# EAGLE board Qwiic_AS3935_Lightning_Detector-Panel (EAGLE 9.2.1), part 1 of 3
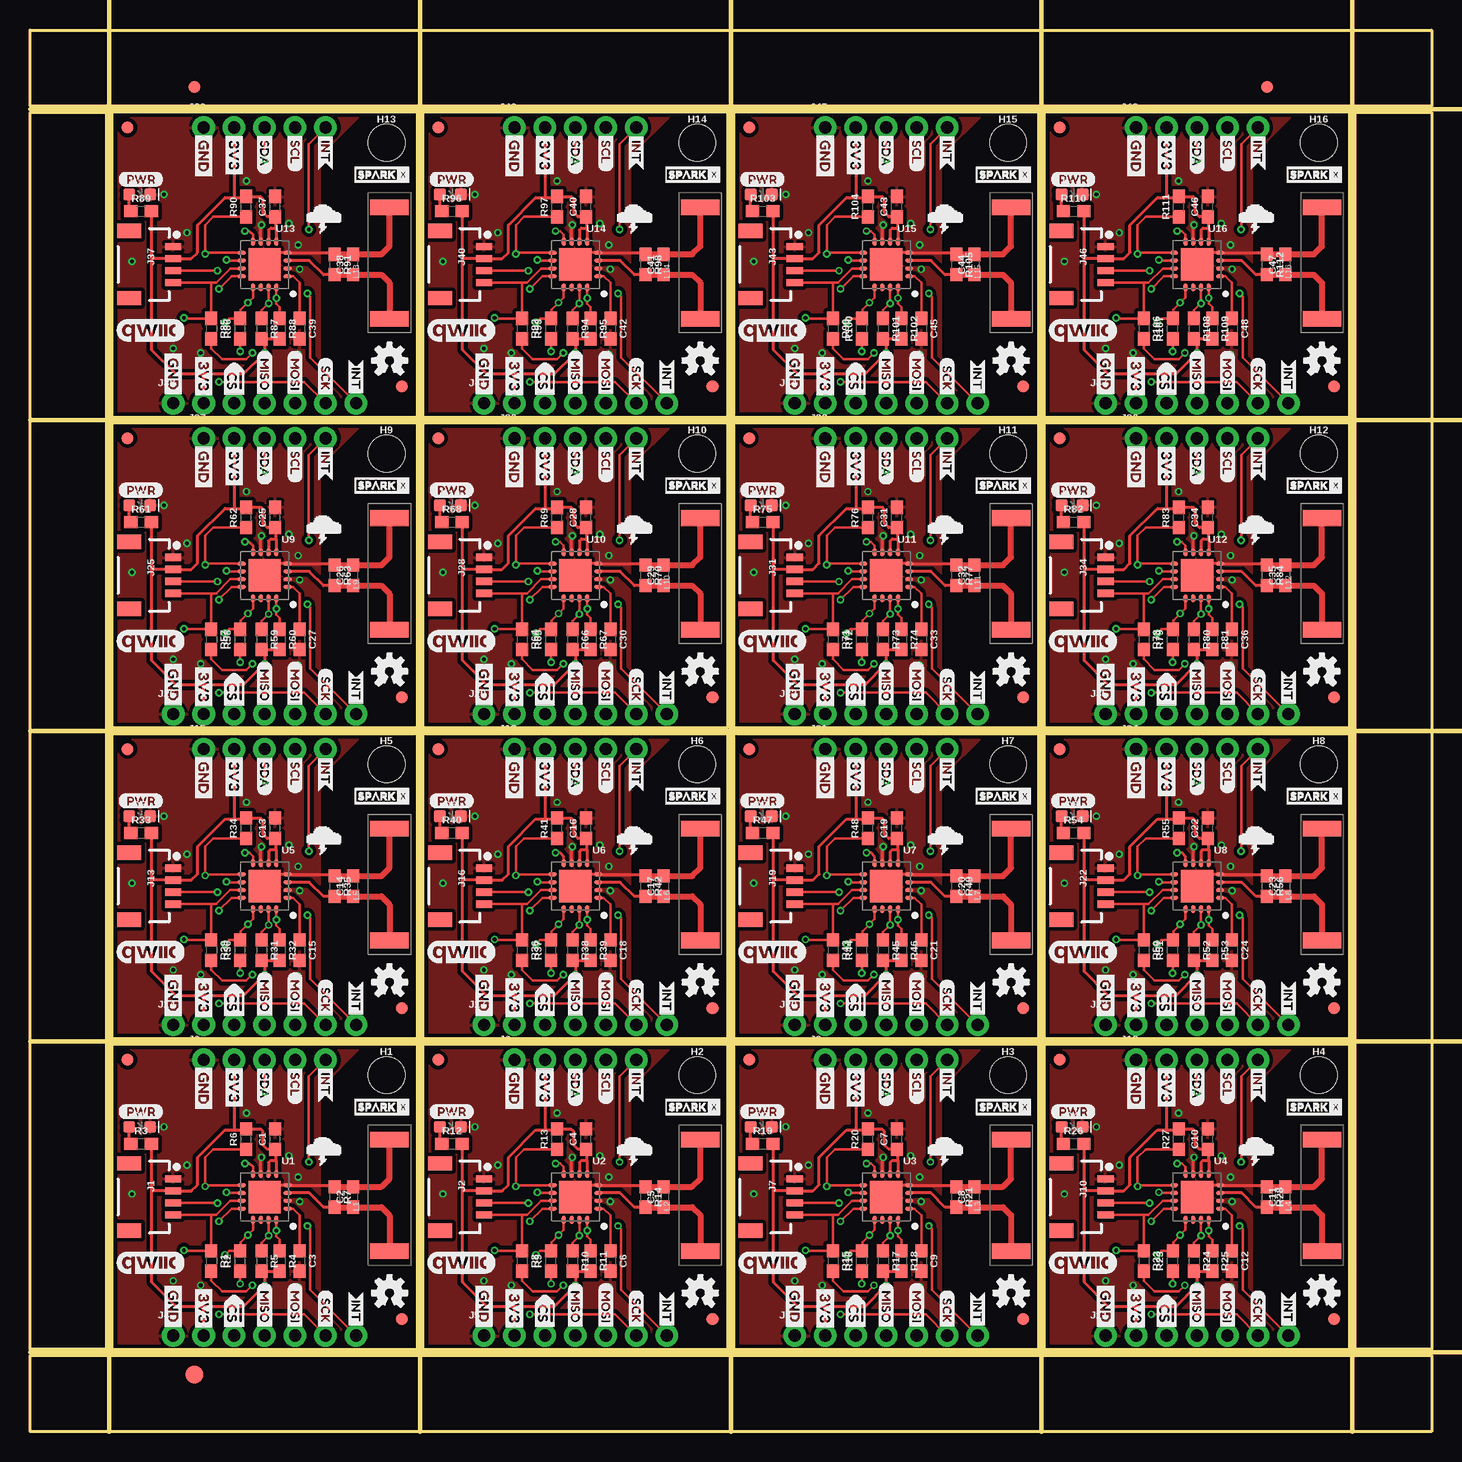
[diagram p0: board, top side]
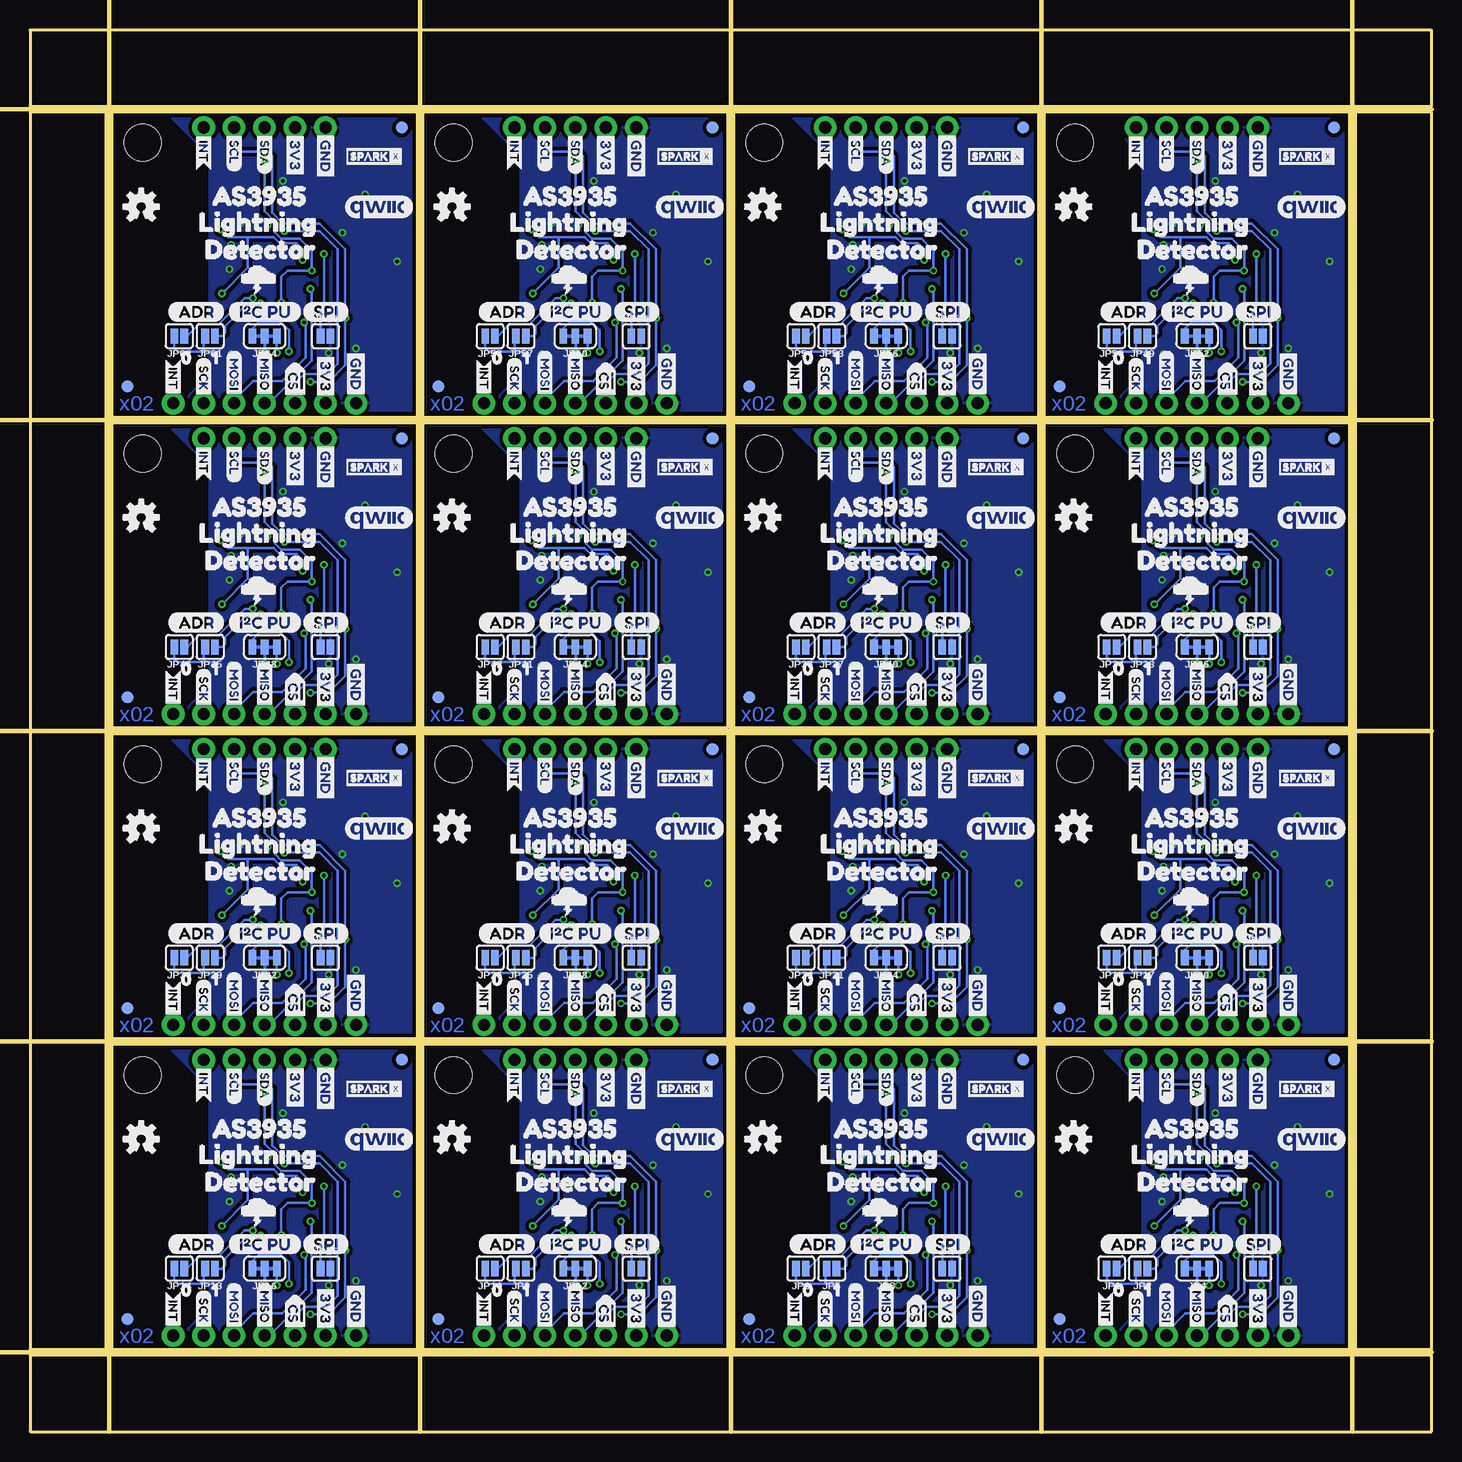
[diagram p1: board, bottom side, seen from below]

Size 116.84 x 116.84 mm. Coordinates in mm from the lower left corner, seen from the top.
Outline: 6.86,6.86 32.26,6.86 32.26,32.26 6.86,32.26 6.86,6.86
Outline: 32.77,6.86 58.17,6.86 58.17,32.26 32.77,32.26 32.77,6.86
Outline: 58.67,6.86 84.07,6.86 84.07,32.26 58.67,32.26 58.67,6.86
Outline: 84.58,6.86 109.98,6.86 109.98,32.26 84.58,32.26 84.58,6.86
Outline: 6.86,32.77 32.26,32.77 32.26,58.17 6.86,58.17 6.86,32.77
Outline: 32.77,32.77 58.17,32.77 58.17,58.17 32.77,58.17 32.77,32.77
Outline: 58.67,32.77 84.07,32.77 84.07,58.17 58.67,58.17 58.67,32.77
Outline: 84.58,32.77 109.98,32.77 109.98,58.17 84.58,58.17 84.58,32.77
Outline: 6.86,58.67 32.26,58.67 32.26,84.07 6.86,84.07 6.86,58.67
Outline: 32.77,58.67 58.17,58.67 58.17,84.07 32.77,84.07 32.77,58.67
Outline: 58.67,58.67 84.07,58.67 84.07,84.07 58.67,84.07 58.67,58.67
Outline: 84.58,58.67 109.98,58.67 109.98,84.07 84.58,84.07 84.58,58.67
Outline: 6.86,84.58 32.26,84.58 32.26,109.98 6.86,109.98 6.86,84.58
Outline: 32.77,84.58 58.17,84.58 58.17,109.98 32.77,109.98 32.77,84.58
Outline: 58.67,84.58 84.07,84.58 84.07,109.98 58.67,109.98 58.67,84.58
Outline: 84.58,84.58 109.98,84.58 109.98,109.98 84.58,109.98 84.58,84.58
Outline: 0,6.35 116.84,6.35 116.84,0 0,0 0,6.35
Outline: 110.49,109.98 116.84,109.98 116.84,6.86 110.49,6.86 110.49,109.98
Outline: 0,116.84 116.84,116.84 116.84,110.49 0,110.49 0,116.84
Outline: 0,109.98 6.35,109.98 6.35,6.86 0,6.86 0,109.98
Copper layers (1*16): Top 0.035mm / dielectric 1.5mm / Bottom 0.035mm
Design rules "SparkFun-2-layer-PCBWay-LIMIT": minimum track width 6mil, minimum drill 0.3mm, track to track 6mil, track to pad 6mil, pad to pad 6mil, via to via 6mil, smd to smd 6mil, copper to edge 6mil, drill to drill 6mil, minimum pad ring 6mil, minimum via ring 6mil, stop-mask expansion 4mil, vias tented up to drill 25mil, thermal gap 10mil
Milling: 10 lines

## Footprints (pad centres in the part's own frame; a part is rotated, then mirrored left to right if it is on the bottom)
0603 = smd 1.1 x 1: 1 -0.85,0; 2 0.85,0
LED-0603 = smd 1 x 1: A -0.877,0; C 0.877,0
FIDUCIAL-1X2 = smd 1 x 1: 1 0,0
FIDUCIAL-1.5X3 = smd 1.5 x 1.5: 1 0,0
STAND-OFF-TIGHT = hole 3.048: 0,0
1X04_1MM_RA = smd 0.6 x 1.35: 1 -1.5,0; 2 -0.5,0; 3 0.5,0; 4 1.5,0 | smd 1.2 x 2: NC1 2.8,-3.675; NC2 -2.8,-3.675
1X05_NO_SILK = drill 1.016 pad 1.88: 1 0,0; 2 2.54,0; 3 5.08,0; 4 7.62,0; 5 10.16,0
1X07_NO_SILK = drill 1.016 pad 1.88: 1 0,0; 2 2.54,0; 3 5.08,0; 4 7.62,0; 5 10.16,0; 6 12.7,0; 7 15.24,0
SMT-JUMPER_2_NO_SILK = smd 0.635 x 1.27: 1 -0.406,0; 2 0.406,0
SMT-JUMPER_3_2-NC_TRACE_SILK = smd 0.635 x 1.27: 1 -1.016,0; 2 0,0; 3 1.016,0
MA5532-AE = smd 1.3 x 3.2: 1 -4.65,0; 2 4.65,0
16LD_MLPQ = smd 0.7 x 0.35: 1 -1.919,0.968; 2 -1.919,0.318; 3 -1.919,-0.332; 4 -1.919,-0.982; 9 1.908,-0.982; 10 1.908,-0.332; 11 1.908,0.318; 12 1.908,0.968 | smd 0.35 x 0.7: 5 -0.982,-1.917; 6 -0.332,-1.917; 7 0.318,-1.917; 8 0.968,-1.917; 13 0.968,1.907; 14 0.318,1.907; 15 -0.332,1.907; 16 -0.982,1.907 | smd 2.7 x 2.7: 17 -0.007,-0.007

## Placement (x,y rotation side)
C1  1.0uF  [0603]  20.45,24.38 90 top
C2  1nF  [0603]  26.92,19.56 90 top
C3  10uF  [0603]  22.48,14.22 270 top
C4  1.0uF  [0603]  46.35,24.38 90 top
C5  1nF  [0603]  52.83,19.56 90 top
C6  10uF  [0603]  48.39,14.22 270 top
C7  1.0uF  [0603]  72.26,24.38 90 top
C8  1nF  [0603]  78.74,19.56 90 top
C9  10uF  [0603]  74.3,14.22 270 top
C10  1.0uF  [0603]  98.17,24.38 90 top
C11  1nF  [0603]  104.65,19.56 90 top
C12  10uF  [0603]  100.2,14.22 270 top
C13  1.0uF  [0603]  20.45,50.29 90 top
C14  1nF  [0603]  26.92,45.47 90 top
C15  10uF  [0603]  22.48,40.13 270 top
C16  1.0uF  [0603]  46.35,50.29 90 top
C17  1nF  [0603]  52.83,45.47 90 top
C18  10uF  [0603]  48.39,40.13 270 top
C19  1.0uF  [0603]  72.26,50.29 90 top
C20  1nF  [0603]  78.74,45.47 90 top
C21  10uF  [0603]  74.3,40.13 270 top
C22  1.0uF  [0603]  98.17,50.29 90 top
C23  1nF  [0603]  104.65,45.47 90 top
C24  10uF  [0603]  100.2,40.13 270 top
C25  1.0uF  [0603]  20.45,76.2 90 top
C26  1nF  [0603]  26.92,71.37 90 top
C27  10uF  [0603]  22.48,66.04 270 top
C28  1.0uF  [0603]  46.35,76.2 90 top
C29  1nF  [0603]  52.83,71.37 90 top
C30  10uF  [0603]  48.39,66.04 270 top
C31  1.0uF  [0603]  72.26,76.2 90 top
C32  1nF  [0603]  78.74,71.37 90 top
C33  10uF  [0603]  74.3,66.04 270 top
C34  1.0uF  [0603]  98.17,76.2 90 top
C35  1nF  [0603]  104.65,71.37 90 top
C36  10uF  [0603]  100.2,66.04 270 top
C37  1.0uF  [0603]  20.45,102.11 90 top
C38  1nF  [0603]  26.92,97.28 90 top
C39  10uF  [0603]  22.48,91.95 270 top
C40  1.0uF  [0603]  46.35,102.11 90 top
C41  1nF  [0603]  52.83,97.28 90 top
C42  10uF  [0603]  48.39,91.95 270 top
C43  1.0uF  [0603]  72.26,102.11 90 top
C44  1nF  [0603]  78.74,97.28 90 top
C45  10uF  [0603]  74.3,91.95 270 top
C46  1.0uF  [0603]  98.17,102.11 90 top
C47  1nF  [0603]  104.65,97.28 90 top
C48  10uF  [0603]  100.2,91.95 270 top
D1  RED  [LED-0603]  9.14,25.4 0 top
D2  RED  [LED-0603]  35.05,25.4 0 top
D3  RED  [LED-0603]  60.96,25.4 0 top
D4  RED  [LED-0603]  86.87,25.4 0 top
D5  RED  [LED-0603]  9.14,51.31 0 top
D6  RED  [LED-0603]  35.05,51.31 0 top
D7  RED  [LED-0603]  60.96,51.31 0 top
D8  RED  [LED-0603]  86.87,51.31 0 top
D9  RED  [LED-0603]  9.14,77.22 0 top
D10  RED  [LED-0603]  35.05,77.22 0 top
D11  RED  [LED-0603]  60.96,77.22 0 top
D12  RED  [LED-0603]  86.87,77.22 0 top
D13  RED  [LED-0603]  9.14,103.12 0 top
D14  RED  [LED-0603]  35.05,103.12 0 top
D15  RED  [LED-0603]  60.96,103.12 0 top
D16  RED  [LED-0603]  86.87,103.12 0 top
E$1  [FIDUCIAL-1X2]  13.72,112.08 0 top
E$2  [FIDUCIAL-1X2]  103.12,112.08 0 top
E$3  [FIDUCIAL-1.5X3]  13.72,4.76 0 top
FD1  FIDUCIAL1X2  [FIDUCIAL-1X2]  8.13,30.99 0 bottom
FD2  FIDUCIAL1X2  [FIDUCIAL-1X2]  30.99,9.4 0 bottom
FD3  FIDUCIAL1X2  [FIDUCIAL-1X2]  30.99,9.4 0 top
FD4  FIDUCIAL1X2  [FIDUCIAL-1X2]  8.13,30.99 0 top
FD5  FIDUCIAL1X2  [FIDUCIAL-1X2]  34.04,30.99 0 bottom
FD6  FIDUCIAL1X2  [FIDUCIAL-1X2]  56.9,9.4 0 bottom
FD7  FIDUCIAL1X2  [FIDUCIAL-1X2]  56.9,9.4 0 top
FD8  FIDUCIAL1X2  [FIDUCIAL-1X2]  34.04,30.99 0 top
FD9  FIDUCIAL1X2  [FIDUCIAL-1X2]  59.94,30.99 0 bottom
FD10  FIDUCIAL1X2  [FIDUCIAL-1X2]  82.8,9.4 0 bottom
FD11  FIDUCIAL1X2  [FIDUCIAL-1X2]  82.8,9.4 0 top
FD12  FIDUCIAL1X2  [FIDUCIAL-1X2]  59.94,30.99 0 top
FD13  FIDUCIAL1X2  [FIDUCIAL-1X2]  85.85,30.99 0 bottom
FD14  FIDUCIAL1X2  [FIDUCIAL-1X2]  108.71,9.4 0 bottom
FD15  FIDUCIAL1X2  [FIDUCIAL-1X2]  108.71,9.4 0 top
FD16  FIDUCIAL1X2  [FIDUCIAL-1X2]  85.85,30.99 0 top
FD17  FIDUCIAL1X2  [FIDUCIAL-1X2]  8.13,56.9 0 bottom
FD18  FIDUCIAL1X2  [FIDUCIAL-1X2]  30.99,35.31 0 bottom
FD19  FIDUCIAL1X2  [FIDUCIAL-1X2]  30.99,35.31 0 top
FD20  FIDUCIAL1X2  [FIDUCIAL-1X2]  8.13,56.9 0 top
FD21  FIDUCIAL1X2  [FIDUCIAL-1X2]  34.04,56.9 0 bottom
FD22  FIDUCIAL1X2  [FIDUCIAL-1X2]  56.9,35.31 0 bottom
FD23  FIDUCIAL1X2  [FIDUCIAL-1X2]  56.9,35.31 0 top
FD24  FIDUCIAL1X2  [FIDUCIAL-1X2]  34.04,56.9 0 top
FD25  FIDUCIAL1X2  [FIDUCIAL-1X2]  59.94,56.9 0 bottom
FD26  FIDUCIAL1X2  [FIDUCIAL-1X2]  82.8,35.31 0 bottom
FD27  FIDUCIAL1X2  [FIDUCIAL-1X2]  82.8,35.31 0 top
FD28  FIDUCIAL1X2  [FIDUCIAL-1X2]  59.94,56.9 0 top
FD29  FIDUCIAL1X2  [FIDUCIAL-1X2]  85.85,56.9 0 bottom
FD30  FIDUCIAL1X2  [FIDUCIAL-1X2]  108.71,35.31 0 bottom
FD31  FIDUCIAL1X2  [FIDUCIAL-1X2]  108.71,35.31 0 top
FD32  FIDUCIAL1X2  [FIDUCIAL-1X2]  85.85,56.9 0 top
FD33  FIDUCIAL1X2  [FIDUCIAL-1X2]  8.13,82.8 0 bottom
FD34  FIDUCIAL1X2  [FIDUCIAL-1X2]  30.99,61.21 0 bottom
FD35  FIDUCIAL1X2  [FIDUCIAL-1X2]  30.99,61.21 0 top
FD36  FIDUCIAL1X2  [FIDUCIAL-1X2]  8.13,82.8 0 top
FD37  FIDUCIAL1X2  [FIDUCIAL-1X2]  34.04,82.8 0 bottom
FD38  FIDUCIAL1X2  [FIDUCIAL-1X2]  56.9,61.21 0 bottom
FD39  FIDUCIAL1X2  [FIDUCIAL-1X2]  56.9,61.21 0 top
FD40  FIDUCIAL1X2  [FIDUCIAL-1X2]  34.04,82.8 0 top
FD41  FIDUCIAL1X2  [FIDUCIAL-1X2]  59.94,82.8 0 bottom
FD42  FIDUCIAL1X2  [FIDUCIAL-1X2]  82.8,61.21 0 bottom
FD43  FIDUCIAL1X2  [FIDUCIAL-1X2]  82.8,61.21 0 top
FD44  FIDUCIAL1X2  [FIDUCIAL-1X2]  59.94,82.8 0 top
FD45  FIDUCIAL1X2  [FIDUCIAL-1X2]  85.85,82.8 0 bottom
FD46  FIDUCIAL1X2  [FIDUCIAL-1X2]  108.71,61.21 0 bottom
FD47  FIDUCIAL1X2  [FIDUCIAL-1X2]  108.71,61.21 0 top
FD48  FIDUCIAL1X2  [FIDUCIAL-1X2]  85.85,82.8 0 top
FD49  FIDUCIAL1X2  [FIDUCIAL-1X2]  8.13,108.71 0 bottom
FD50  FIDUCIAL1X2  [FIDUCIAL-1X2]  30.99,87.12 0 bottom
FD51  FIDUCIAL1X2  [FIDUCIAL-1X2]  30.99,87.12 0 top
FD52  FIDUCIAL1X2  [FIDUCIAL-1X2]  8.13,108.71 0 top
FD53  FIDUCIAL1X2  [FIDUCIAL-1X2]  34.04,108.71 0 bottom
FD54  FIDUCIAL1X2  [FIDUCIAL-1X2]  56.9,87.12 0 bottom
FD55  FIDUCIAL1X2  [FIDUCIAL-1X2]  56.9,87.12 0 top
FD56  FIDUCIAL1X2  [FIDUCIAL-1X2]  34.04,108.71 0 top
FD57  FIDUCIAL1X2  [FIDUCIAL-1X2]  59.94,108.71 0 bottom
FD58  FIDUCIAL1X2  [FIDUCIAL-1X2]  82.8,87.12 0 bottom
FD59  FIDUCIAL1X2  [FIDUCIAL-1X2]  82.8,87.12 0 top
FD60  FIDUCIAL1X2  [FIDUCIAL-1X2]  59.94,108.71 0 top
FD61  FIDUCIAL1X2  [FIDUCIAL-1X2]  85.85,108.71 0 bottom
FD62  FIDUCIAL1X2  [FIDUCIAL-1X2]  108.71,87.12 0 bottom
FD63  FIDUCIAL1X2  [FIDUCIAL-1X2]  108.71,87.12 0 top
FD64  FIDUCIAL1X2  [FIDUCIAL-1X2]  85.85,108.71 0 top
H1  STAND-OFFTIGHT  [STAND-OFF-TIGHT]  29.72,29.72 0 top
H2  STAND-OFFTIGHT  [STAND-OFF-TIGHT]  55.63,29.72 0 top
H3  STAND-OFFTIGHT  [STAND-OFF-TIGHT]  81.53,29.72 0 top
H4  STAND-OFFTIGHT  [STAND-OFF-TIGHT]  107.44,29.72 0 top
H5  STAND-OFFTIGHT  [STAND-OFF-TIGHT]  29.72,55.63 0 top
H6  STAND-OFFTIGHT  [STAND-OFF-TIGHT]  55.63,55.63 0 top
H7  STAND-OFFTIGHT  [STAND-OFF-TIGHT]  81.53,55.63 0 top
H8  STAND-OFFTIGHT  [STAND-OFF-TIGHT]  107.44,55.63 0 top
H9  STAND-OFFTIGHT  [STAND-OFF-TIGHT]  29.72,81.53 0 top
H10  STAND-OFFTIGHT  [STAND-OFF-TIGHT]  55.63,81.53 0 top
H11  STAND-OFFTIGHT  [STAND-OFF-TIGHT]  81.53,81.53 0 top
H12  STAND-OFFTIGHT  [STAND-OFF-TIGHT]  107.44,81.53 0 top
H13  STAND-OFFTIGHT  [STAND-OFF-TIGHT]  29.72,107.44 0 top
H14  STAND-OFFTIGHT  [STAND-OFF-TIGHT]  55.63,107.44 0 top
H15  STAND-OFFTIGHT  [STAND-OFF-TIGHT]  81.53,107.44 0 top
H16  STAND-OFFTIGHT  [STAND-OFF-TIGHT]  107.44,107.44 0 top
J1  [1X04_1MM_RA]  11.94,19.56 270 top
J2  [1X04_1MM_RA]  37.85,19.56 270 top
J3  [1X05_NO_SILK]  14.48,30.99 0 top
J4  [1X07_NO_SILK]  11.94,8 0 top
J5  [1X07_NO_SILK]  37.85,8 0 top
J6  [1X05_NO_SILK]  40.39,30.99 0 top
J7  [1X04_1MM_RA]  63.75,19.56 270 top
J8  [1X07_NO_SILK]  63.75,8 0 top
J9  [1X05_NO_SILK]  66.29,30.99 0 top
J10  [1X04_1MM_RA]  89.66,19.56 270 top
J11  [1X07_NO_SILK]  89.66,8 0 top
J12  [1X05_NO_SILK]  92.2,30.99 0 top
J13  [1X04_1MM_RA]  11.94,45.47 270 top
J14  [1X07_NO_SILK]  11.94,33.91 0 top
J15  [1X05_NO_SILK]  14.48,56.9 0 top
J16  [1X04_1MM_RA]  37.85,45.47 270 top
J17  [1X07_NO_SILK]  37.85,33.91 0 top
J18  [1X05_NO_SILK]  40.39,56.9 0 top
J19  [1X04_1MM_RA]  63.75,45.47 270 top
J20  [1X07_NO_SILK]  63.75,33.91 0 top
J21  [1X05_NO_SILK]  66.29,56.9 0 top
J22  [1X04_1MM_RA]  89.66,45.47 270 top
J23  [1X07_NO_SILK]  89.66,33.91 0 top
J24  [1X05_NO_SILK]  92.2,56.9 0 top
J25  [1X04_1MM_RA]  11.94,71.37 270 top
J26  [1X07_NO_SILK]  11.94,59.82 0 top
J27  [1X05_NO_SILK]  14.48,82.8 0 top
J28  [1X04_1MM_RA]  37.85,71.37 270 top
J29  [1X07_NO_SILK]  37.85,59.82 0 top
J30  [1X05_NO_SILK]  40.39,82.8 0 top
J31  [1X04_1MM_RA]  63.75,71.37 270 top
J32  [1X07_NO_SILK]  63.75,59.82 0 top
J33  [1X05_NO_SILK]  66.29,82.8 0 top
J34  [1X04_1MM_RA]  89.66,71.37 270 top
J35  [1X07_NO_SILK]  89.66,59.82 0 top
J36  [1X05_NO_SILK]  92.2,82.8 0 top
J37  [1X04_1MM_RA]  11.94,97.28 270 top
J38  [1X07_NO_SILK]  11.94,85.73 0 top
J39  [1X05_NO_SILK]  14.48,108.71 0 top
J40  [1X04_1MM_RA]  37.85,97.28 270 top
J41  [1X07_NO_SILK]  37.85,85.73 0 top
J42  [1X05_NO_SILK]  40.39,108.71 0 top
J43  [1X04_1MM_RA]  63.75,97.28 270 top
J44  [1X07_NO_SILK]  63.75,85.73 0 top
J45  [1X05_NO_SILK]  66.29,108.71 0 top
J46  [1X04_1MM_RA]  89.66,97.28 270 top
J47  [1X07_NO_SILK]  89.66,85.73 0 top
J48  [1X05_NO_SILK]  92.2,108.71 0 top
JP1  JUMPER-SMT_2_NO_SILK  [SMT-JUMPER_2_NO_SILK]  26.67,13.59 180 bottom
JP2  JUMPER-SMT_2_NO_SILK  [SMT-JUMPER_2_NO_SILK]  24.1,13.59 180 bottom
JP3  JUMPER-SMT_2_NO_SILK  [SMT-JUMPER_2_NO_SILK]  14.48,13.59 0 bottom
JP4  JUMPER-SMT_3_2-NC_TRACE_SILK  [SMT-JUMPER_3_2-NC_TRACE_SILK]  19.56,13.59 180 bottom
JP5  JUMPER-SMT_2_NO_SILK  [SMT-JUMPER_2_NO_SILK]  50.01,13.59 180 bottom
JP6  JUMPER-SMT_2_NO_SILK  [SMT-JUMPER_2_NO_SILK]  52.58,13.59 180 bottom
JP7  JUMPER-SMT_2_NO_SILK  [SMT-JUMPER_2_NO_SILK]  40.39,13.59 0 bottom
JP8  JUMPER-SMT_3_2-NC_TRACE_SILK  [SMT-JUMPER_3_2-NC_TRACE_SILK]  45.47,13.59 180 bottom
JP9  JUMPER-SMT_2_NO_SILK  [SMT-JUMPER_2_NO_SILK]  75.92,13.59 180 bottom
JP10  JUMPER-SMT_2_NO_SILK  [SMT-JUMPER_2_NO_SILK]  78.49,13.59 180 bottom
JP11  JUMPER-SMT_2_NO_SILK  [SMT-JUMPER_2_NO_SILK]  66.29,13.59 0 bottom
JP12  JUMPER-SMT_3_2-NC_TRACE_SILK  [SMT-JUMPER_3_2-NC_TRACE_SILK]  71.37,13.59 180 bottom
JP13  JUMPER-SMT_2_NO_SILK  [SMT-JUMPER_2_NO_SILK]  101.83,13.59 180 bottom
JP14  JUMPER-SMT_2_NO_SILK  [SMT-JUMPER_2_NO_SILK]  104.39,13.59 180 bottom
JP15  JUMPER-SMT_2_NO_SILK  [SMT-JUMPER_2_NO_SILK]  92.2,13.59 0 bottom
JP16  JUMPER-SMT_3_2-NC_TRACE_SILK  [SMT-JUMPER_3_2-NC_TRACE_SILK]  97.28,13.59 180 bottom
JP17  JUMPER-SMT_2_NO_SILK  [SMT-JUMPER_2_NO_SILK]  24.1,39.5 180 bottom
JP18  JUMPER-SMT_2_NO_SILK  [SMT-JUMPER_2_NO_SILK]  26.67,39.5 180 bottom
JP19  JUMPER-SMT_2_NO_SILK  [SMT-JUMPER_2_NO_SILK]  14.48,39.5 0 bottom
JP20  JUMPER-SMT_3_2-NC_TRACE_SILK  [SMT-JUMPER_3_2-NC_TRACE_SILK]  19.56,39.5 180 bottom
JP21  JUMPER-SMT_2_NO_SILK  [SMT-JUMPER_2_NO_SILK]  50.01,39.5 180 bottom
JP22  JUMPER-SMT_2_NO_SILK  [SMT-JUMPER_2_NO_SILK]  52.58,39.5 180 bottom
JP23  JUMPER-SMT_2_NO_SILK  [SMT-JUMPER_2_NO_SILK]  40.39,39.5 0 bottom
JP24  JUMPER-SMT_3_2-NC_TRACE_SILK  [SMT-JUMPER_3_2-NC_TRACE_SILK]  45.47,39.5 180 bottom
JP25  JUMPER-SMT_2_NO_SILK  [SMT-JUMPER_2_NO_SILK]  75.92,39.5 180 bottom
JP26  JUMPER-SMT_2_NO_SILK  [SMT-JUMPER_2_NO_SILK]  78.49,39.5 180 bottom
JP27  JUMPER-SMT_2_NO_SILK  [SMT-JUMPER_2_NO_SILK]  66.29,39.5 0 bottom
JP28  JUMPER-SMT_3_2-NC_TRACE_SILK  [SMT-JUMPER_3_2-NC_TRACE_SILK]  71.37,39.5 180 bottom
JP29  JUMPER-SMT_2_NO_SILK  [SMT-JUMPER_2_NO_SILK]  101.83,39.5 180 bottom
JP30  JUMPER-SMT_2_NO_SILK  [SMT-JUMPER_2_NO_SILK]  104.39,39.5 180 bottom
JP31  JUMPER-SMT_2_NO_SILK  [SMT-JUMPER_2_NO_SILK]  92.2,39.5 0 bottom
JP32  JUMPER-SMT_3_2-NC_TRACE_SILK  [SMT-JUMPER_3_2-NC_TRACE_SILK]  97.28,39.5 180 bottom
JP33  JUMPER-SMT_2_NO_SILK  [SMT-JUMPER_2_NO_SILK]  24.1,65.41 180 bottom
JP34  JUMPER-SMT_2_NO_SILK  [SMT-JUMPER_2_NO_SILK]  26.67,65.41 180 bottom
JP35  JUMPER-SMT_2_NO_SILK  [SMT-JUMPER_2_NO_SILK]  14.48,65.41 0 bottom
JP36  JUMPER-SMT_3_2-NC_TRACE_SILK  [SMT-JUMPER_3_2-NC_TRACE_SILK]  19.56,65.41 180 bottom
JP37  JUMPER-SMT_2_NO_SILK  [SMT-JUMPER_2_NO_SILK]  50.01,65.41 180 bottom
JP38  JUMPER-SMT_2_NO_SILK  [SMT-JUMPER_2_NO_SILK]  52.58,65.41 180 bottom
JP39  JUMPER-SMT_2_NO_SILK  [SMT-JUMPER_2_NO_SILK]  40.39,65.41 0 bottom
JP40  JUMPER-SMT_3_2-NC_TRACE_SILK  [SMT-JUMPER_3_2-NC_TRACE_SILK]  45.47,65.41 180 bottom
JP41  JUMPER-SMT_2_NO_SILK  [SMT-JUMPER_2_NO_SILK]  75.92,65.41 180 bottom
JP42  JUMPER-SMT_2_NO_SILK  [SMT-JUMPER_2_NO_SILK]  78.49,65.41 180 bottom
JP43  JUMPER-SMT_2_NO_SILK  [SMT-JUMPER_2_NO_SILK]  66.29,65.41 0 bottom
JP44  JUMPER-SMT_3_2-NC_TRACE_SILK  [SMT-JUMPER_3_2-NC_TRACE_SILK]  71.37,65.41 180 bottom
JP45  JUMPER-SMT_2_NO_SILK  [SMT-JUMPER_2_NO_SILK]  101.83,65.41 180 bottom
JP46  JUMPER-SMT_2_NO_SILK  [SMT-JUMPER_2_NO_SILK]  104.39,65.41 180 bottom
JP47  JUMPER-SMT_2_NO_SILK  [SMT-JUMPER_2_NO_SILK]  92.2,65.41 0 bottom
JP48  JUMPER-SMT_3_2-NC_TRACE_SILK  [SMT-JUMPER_3_2-NC_TRACE_SILK]  97.28,65.41 180 bottom
JP49  JUMPER-SMT_2_NO_SILK  [SMT-JUMPER_2_NO_SILK]  24.1,91.31 180 bottom
JP50  JUMPER-SMT_2_NO_SILK  [SMT-JUMPER_2_NO_SILK]  26.67,91.31 180 bottom
JP51  JUMPER-SMT_2_NO_SILK  [SMT-JUMPER_2_NO_SILK]  14.48,91.31 0 bottom
JP52  JUMPER-SMT_3_2-NC_TRACE_SILK  [SMT-JUMPER_3_2-NC_TRACE_SILK]  19.56,91.31 180 bottom
JP53  JUMPER-SMT_2_NO_SILK  [SMT-JUMPER_2_NO_SILK]  50.01,91.31 180 bottom
JP54  JUMPER-SMT_2_NO_SILK  [SMT-JUMPER_2_NO_SILK]  52.58,91.31 180 bottom
JP55  JUMPER-SMT_2_NO_SILK  [SMT-JUMPER_2_NO_SILK]  40.39,91.31 0 bottom
JP56  JUMPER-SMT_3_2-NC_TRACE_SILK  [SMT-JUMPER_3_2-NC_TRACE_SILK]  45.47,91.31 180 bottom
JP57  JUMPER-SMT_2_NO_SILK  [SMT-JUMPER_2_NO_SILK]  75.92,91.31 180 bottom
JP58  JUMPER-SMT_2_NO_SILK  [SMT-JUMPER_2_NO_SILK]  78.49,91.31 180 bottom
JP59  JUMPER-SMT_2_NO_SILK  [SMT-JUMPER_2_NO_SILK]  66.29,91.31 0 bottom
JP60  JUMPER-SMT_3_2-NC_TRACE_SILK  [SMT-JUMPER_3_2-NC_TRACE_SILK]  71.37,91.31 180 bottom
JP61  JUMPER-SMT_2_NO_SILK  [SMT-JUMPER_2_NO_SILK]  101.83,91.31 180 bottom
JP62  JUMPER-SMT_2_NO_SILK  [SMT-JUMPER_2_NO_SILK]  104.39,91.31 180 bottom
JP63  JUMPER-SMT_2_NO_SILK  [SMT-JUMPER_2_NO_SILK]  92.2,91.31 0 bottom
JP64  JUMPER-SMT_3_2-NC_TRACE_SILK  [SMT-JUMPER_3_2-NC_TRACE_SILK]  97.28,91.31 180 bottom
L1  100uH  [MA5532-AE]  29.97,19.68 90 top
L2  100uH  [MA5532-AE]  55.88,19.68 90 top
L3  100uH  [MA5532-AE]  81.79,19.68 90 top
L4  100uH  [MA5532-AE]  107.7,19.68 90 top
L5  100uH  [MA5532-AE]  29.97,45.59 90 top
L6  100uH  [MA5532-AE]  55.88,45.59 90 top
L7  100uH  [MA5532-AE]  81.79,45.59 90 top
L8  100uH  [MA5532-AE]  107.7,45.59 90 top
L9  100uH  [MA5532-AE]  29.97,71.5 90 top
L10  100uH  [MA5532-AE]  55.88,71.5 90 top
L11  100uH  [MA5532-AE]  81.79,71.5 90 top
L12  100uH  [MA5532-AE]  107.7,71.5 90 top
L13  100uH  [MA5532-AE]  29.97,97.41 90 top
L14  100uH  [MA5532-AE]  55.88,97.41 90 top
L15  100uH  [MA5532-AE]  81.79,97.41 90 top
L16  100uH  [MA5532-AE]  107.7,97.41 90 top
LOGO1  OSHW-LOGOS  [OSHW-LOGO-S]  29.97,11.56 0 top
LOGO2  OSHW-LOGOS  [OSHW-LOGO-S]  55.88,11.56 0 top
LOGO3  OSHW-LOGOS  [OSHW-LOGO-S]  81.79,11.56 0 top
LOGO4  OSHW-LOGOS  [OSHW-LOGO-S]  107.7,11.56 0 top
LOGO5  OSHW-LOGOS  [OSHW-LOGO-S]  29.97,37.46 0 top
LOGO6  OSHW-LOGOS  [OSHW-LOGO-S]  55.88,37.46 0 top
LOGO7  OSHW-LOGOS  [OSHW-LOGO-S]  81.79,37.46 0 top
LOGO8  OSHW-LOGOS  [OSHW-LOGO-S]  107.7,37.46 0 top
LOGO9  OSHW-LOGOS  [OSHW-LOGO-S]  29.97,63.37 0 top
LOGO10  OSHW-LOGOS  [OSHW-LOGO-S]  55.88,63.37 0 top
LOGO11  OSHW-LOGOS  [OSHW-LOGO-S]  81.79,63.37 0 top
LOGO12  OSHW-LOGOS  [OSHW-LOGO-S]  107.7,63.37 0 top
LOGO13  OSHW-LOGOS  [OSHW-LOGO-S]  29.97,89.28 0 top
LOGO14  OSHW-LOGOS  [OSHW-LOGO-S]  55.88,89.28 0 top
LOGO15  OSHW-LOGOS  [OSHW-LOGO-S]  81.79,89.28 0 top
LOGO16  OSHW-LOGOS  [OSHW-LOGO-S]  107.7,89.28 0 top
R1  2.2k  [0603]  15.11,14.22 270 top
R2  2.2k  [0603]  17.53,14.22 90 top
R3  1k  [0603]  9.27,24 0 top
R4  2.2k  [0603]  20.83,14.22 270 top
R5  2.2k  [0603]  19.3,14.22 270 top
R6  1k  [0603]  18.03,24.38 90 top
R7  10k  [0603]  25.4,19.56 270 top
R8  2.2k  [0603]  41.02,14.22 270 top
R9  2.2k  [0603]  43.43,14.22 90 top
R10  2.2k  [0603]  45.21,14.22 270 top
R11  2.2k  [0603]  46.74,14.22 270 top
R12  1k  [0603]  35.18,24 0 top
R13  1k  [0603]  43.94,24.38 90 top
R14  10k  [0603]  51.31,19.56 270 top
R15  2.2k  [0603]  66.93,14.22 270 top
R16  2.2k  [0603]  69.34,14.22 90 top
R17  2.2k  [0603]  71.12,14.22 270 top
R18  2.2k  [0603]  72.64,14.22 270 top
R19  1k  [0603]  61.09,24 0 top
R20  1k  [0603]  69.85,24.38 90 top
R21  10k  [0603]  77.22,19.56 270 top
R22  2.2k  [0603]  92.84,14.22 270 top
R23  2.2k  [0603]  95.25,14.22 90 top
R24  2.2k  [0603]  97.03,14.22 270 top
R25  2.2k  [0603]  98.55,14.22 270 top
R26  1k  [0603]  87,24 0 top
R27  1k  [0603]  95.76,24.38 90 top
R28  10k  [0603]  103.12,19.56 270 top
R29  2.2k  [0603]  15.11,40.13 270 top
R30  2.2k  [0603]  17.53,40.13 90 top
R31  2.2k  [0603]  19.3,40.13 270 top
R32  2.2k  [0603]  20.83,40.13 270 top
R33  1k  [0603]  9.27,49.91 0 top
R34  1k  [0603]  18.03,50.29 90 top
R35  10k  [0603]  25.4,45.47 270 top
R36  2.2k  [0603]  41.02,40.13 270 top
R37  2.2k  [0603]  43.43,40.13 90 top
R38  2.2k  [0603]  45.21,40.13 270 top
R39  2.2k  [0603]  46.74,40.13 270 top
R40  1k  [0603]  35.18,49.91 0 top
R41  1k  [0603]  43.94,50.29 90 top
R42  10k  [0603]  51.31,45.47 270 top
R43  2.2k  [0603]  66.93,40.13 270 top
R44  2.2k  [0603]  69.34,40.13 90 top
R45  2.2k  [0603]  71.12,40.13 270 top
R46  2.2k  [0603]  72.64,40.13 270 top
R47  1k  [0603]  61.09,49.91 0 top
R48  1k  [0603]  69.85,50.29 90 top
R49  10k  [0603]  77.22,45.47 270 top
R50  2.2k  [0603]  92.84,40.13 270 top
R51  2.2k  [0603]  95.25,40.13 90 top
R52  2.2k  [0603]  97.03,40.13 270 top
R53  2.2k  [0603]  98.55,40.13 270 top
R54  1k  [0603]  87,49.91 0 top
R55  1k  [0603]  95.76,50.29 90 top
R56  10k  [0603]  103.12,45.47 270 top
R57  2.2k  [0603]  15.11,66.04 270 top
R58  2.2k  [0603]  17.53,66.04 90 top
R59  2.2k  [0603]  19.3,66.04 270 top
R60  2.2k  [0603]  20.83,66.04 270 top
R61  1k  [0603]  9.27,75.82 0 top
R62  1k  [0603]  18.03,76.2 90 top
R63  10k  [0603]  25.4,71.37 270 top
R64  2.2k  [0603]  41.02,66.04 270 top
R65  2.2k  [0603]  43.43,66.04 90 top
R66  2.2k  [0603]  45.21,66.04 270 top
R67  2.2k  [0603]  46.74,66.04 270 top
R68  1k  [0603]  35.18,75.82 0 top
R69  1k  [0603]  43.94,76.2 90 top
R70  10k  [0603]  51.31,71.37 270 top
R71  2.2k  [0603]  66.93,66.04 270 top
R72  2.2k  [0603]  69.34,66.04 90 top
R73  2.2k  [0603]  71.12,66.04 270 top
R74  2.2k  [0603]  72.64,66.04 270 top
R75  1k  [0603]  61.09,75.82 0 top
R76  1k  [0603]  69.85,76.2 90 top
R77  10k  [0603]  77.22,71.37 270 top
R78  2.2k  [0603]  92.84,66.04 270 top
R79  2.2k  [0603]  95.25,66.04 90 top
R80  2.2k  [0603]  97.03,66.04 270 top
R81  2.2k  [0603]  98.55,66.04 270 top
R82  1k  [0603]  87,75.82 0 top
R83  1k  [0603]  95.76,76.2 90 top
R84  10k  [0603]  103.12,71.37 270 top
R85  2.2k  [0603]  15.11,91.95 270 top
R86  2.2k  [0603]  17.53,91.95 90 top
R87  2.2k  [0603]  19.3,91.95 270 top
R88  2.2k  [0603]  20.83,91.95 270 top
R89  1k  [0603]  9.27,101.73 0 top
R90  1k  [0603]  18.03,102.11 90 top
R91  10k  [0603]  25.4,97.28 270 top
R92  2.2k  [0603]  41.02,91.95 270 top
R93  2.2k  [0603]  43.43,91.95 90 top
R94  2.2k  [0603]  45.21,91.95 270 top
R95  2.2k  [0603]  46.74,91.95 270 top
R96  1k  [0603]  35.18,101.73 0 top
R97  1k  [0603]  43.94,102.11 90 top
R98  10k  [0603]  51.31,97.28 270 top
R99  2.2k  [0603]  66.93,91.95 270 top
R100  2.2k  [0603]  69.34,91.95 90 top
R101  2.2k  [0603]  71.12,91.95 270 top
R102  2.2k  [0603]  72.64,91.95 270 top
R103  1k  [0603]  61.09,101.73 0 top
R104  1k  [0603]  69.85,102.11 90 top
R105  10k  [0603]  77.22,97.28 270 top
R106  2.2k  [0603]  92.84,91.95 270 top
R107  2.2k  [0603]  95.25,91.95 90 top
R108  2.2k  [0603]  97.03,91.95 270 top
R109  2.2k  [0603]  98.55,91.95 270 top
R110  1k  [0603]  87,101.73 0 top
R111  1k  [0603]  95.76,102.11 90 top
R112  10k  [0603]  103.12,97.28 270 top
U1  AS3935  [16LD_MLPQ]  19.56,19.56 180 top
U2  AS3935  [16LD_MLPQ]  45.47,19.56 180 top
U3  AS3935  [16LD_MLPQ]  71.37,19.56 180 top
U4  AS3935  [16LD_MLPQ]  97.28,19.56 180 top
U5  AS3935  [16LD_MLPQ]  19.56,45.47 180 top
U6  AS3935  [16LD_MLPQ]  45.47,45.47 180 top
U7  AS3935  [16LD_MLPQ]  71.37,45.47 180 top
U8  AS3935  [16LD_MLPQ]  97.28,45.47 180 top
U9  AS3935  [16LD_MLPQ]  19.56,71.37 180 top
U10  AS3935  [16LD_MLPQ]  45.47,71.37 180 top
U11  AS3935  [16LD_MLPQ]  71.37,71.37 180 top
U12  AS3935  [16LD_MLPQ]  97.28,71.37 180 top
U13  AS3935  [16LD_MLPQ]  19.56,97.28 180 top
U14  AS3935  [16LD_MLPQ]  45.47,97.28 180 top
U15  AS3935  [16LD_MLPQ]  71.37,97.28 180 top
U16  AS3935  [16LD_MLPQ]  97.28,97.28 180 top
U$1  SPARKX-LOGO2  [SPARKX-TINY]  29.34,27.05 0 top
U$2  [SPARKX-TINY]  10.41,28.57 0 bottom
U$3  [QWIIC_COPYRIGHT_SMALL]  10.03,14.1 0 top
U$4  [QWIIC_COPYRIGHT_SMALL]  10.03,24.38 0 bottom
U$5  [##0]  24.13,18.41 0 bottom
U$6  [AS39350]  25.27,25.27 0 bottom
U$7  [LIGHTNING0]  26.42,23.11 0 bottom
U$8  [GND-03]  14.48,30.73 270 top
U$9  [GND-03]  11.94,12.57 270 top
U$10  [GND-03]  11.94,12.57 270 bottom
U$11  [CS#-<]-04]  17.02,11.68 270 top
U$12  [MISO-(]-03]  19.56,12.45 270 bottom
U$13  [MISO-(]-03]  19.56,12.45 270 top
U$14  [INT0]  27.18,11.68 270 bottom
U$15  [INT0]  24.64,30.61 270 bottom
U$16  [MOSI-(]-03]  22.1,12.45 270 top
U$17  [3V3-03]  14.48,12.32 270 top
U$18  [3V3-03]  14.48,12.32 270 bottom
U$19  [SCK-(]-03]  24.64,11.81 270 top
U$20  [3V3-03]  17.02,30.73 270 bottom
U$21  [3V3-03]  17.02,30.73 270 top
U$22  [MOSI-(]-03]  22.1,12.45 270 bottom
U$23  [SCK-(]-03]  24.64,11.81 270 bottom
U$24  [INT0]  24.64,30.61 270 top
U$25  [SDA0]  19.56,30.61 270 top
U$26  [SDA0]  19.56,30.61 270 bottom
U$27  [SCL0]  22.1,30.61 270 bottom
U$28  [SCL0]  22.1,30.61 270 top
U$29  [INT0]  27.18,11.68 270 top
U$30  [#CS0]  17.02,11.68 270 bottom
U$31  [OSHW-LOGO-S]  29.84,24.38 0 bottom
U$32  [PWR-()-03]  7.37,26.67 0 top
U$33  [ADR-()-04]  27.69,15.62 0 bottom
U$34  [I#C_PU0]  22.61,15.62 0 bottom
U$35  [SPI0]  16.38,15.62 0 bottom
U$36  [10]  24.89,11.81 0 bottom
U$37  [00]  27.43,11.81 0 bottom
U$38  [GND-03]  14.48,30.73 270 bottom
U$39  [DETECTOR0]  25.91,20.83 0 bottom
U$40  [##0]  20.45,23.5 0 top
U$41  SPARKX-LOGO2  [SPARKX-TINY]  55.24,27.05 0 top
U$42  [SPARKX-TINY]  36.32,28.57 0 bottom
U$43  [QWIIC_COPYRIGHT_SMALL]  35.94,14.1 0 top
U$44  [QWIIC_COPYRIGHT_SMALL]  35.94,24.38 0 bottom
U$45  [GND-03]  37.85,12.57 270 top
U$46  [GND-03]  37.85,12.57 270 bottom
U$47  [MISO-(]-03]  45.47,12.45 270 bottom
U$48  [3V3-03]  40.39,12.32 270 top
U$49  [3V3-03]  40.39,12.32 270 bottom
U$50  [3V3-03]  42.93,30.73 270 bottom
U$51  [3V3-03]  42.93,30.73 270 top
U$52  [SDA0]  45.47,30.61 270 top
U$53  [SDA0]  45.47,30.61 270 bottom
U$54  [SCL0]  48.01,30.61 270 bottom
U$55  [SCL0]  48.01,30.61 270 top
U$56  [OSHW-LOGO-S]  55.75,24.38 0 bottom
U$57  [PWR-()-03]  33.27,26.67 0 top
U$58  [ADR-()-04]  53.59,15.62 0 bottom
U$59  [I#C_PU0]  48.51,15.62 0 bottom
U$60  [SPI0]  42.29,15.62 0 bottom
U$61  [10]  50.8,11.81 0 bottom
U$62  [00]  53.34,11.81 0 bottom
U$63  [GND-03]  40.39,30.73 270 bottom
U$64  [AS39350]  51.18,25.27 0 bottom
U$65  [LIGHTNING0]  52.32,23.11 0 bottom
U$66  [DETECTOR0]  51.82,20.83 0 bottom
U$67  [##0]  46.35,23.5 0 top
U$68  [##0]  50.04,18.41 0 bottom
U$69  [GND-03]  40.39,30.73 270 top
U$70  [CS#-<]-04]  42.93,11.68 270 top
U$71  [MOSI-(]-03]  48.01,12.45 270 top
U$72  [MISO-(]-03]  45.47,12.45 270 top
U$73  [SCK-(]-03]  50.55,11.81 270 top
U$74  [INT0]  53.09,11.68 270 top
U$75  [INT0]  50.55,30.61 270 top
U$76  [INT0]  53.09,11.68 270 bottom
U$77  [INT0]  50.55,30.61 270 bottom
U$78  [MOSI-(]-03]  48.01,12.45 270 bottom
U$79  [SCK-(]-03]  50.55,11.81 270 bottom
U$80  [#CS0]  42.93,11.68 270 bottom
U$81  SPARKX-LOGO2  [SPARKX-TINY]  81.15,27.05 0 top
U$82  [SPARKX-TINY]  62.23,28.57 0 bottom
U$83  [QWIIC_COPYRIGHT_SMALL]  61.85,14.1 0 top
U$84  [QWIIC_COPYRIGHT_SMALL]  61.85,24.38 0 bottom
U$85  [GND-03]  63.75,12.57 270 top
U$86  [GND-03]  63.75,12.57 270 bottom
U$87  [MISO-(]-03]  71.37,12.45 270 bottom
U$88  [3V3-03]  66.29,12.32 270 top
U$89  [3V3-03]  66.29,12.32 270 bottom
U$90  [3V3-03]  68.83,30.73 270 bottom
U$91  [3V3-03]  68.83,30.73 270 top
U$92  [SDA0]  71.37,30.61 270 top
U$93  [SDA0]  71.37,30.61 270 bottom
U$94  [SCL0]  73.91,30.61 270 bottom
U$95  [SCL0]  73.91,30.61 270 top
U$96  [OSHW-LOGO-S]  81.66,24.38 0 bottom
U$97  [PWR-()-03]  59.18,26.67 0 top
U$98  [ADR-()-04]  79.5,15.62 0 bottom
U$99  [I#C_PU0]  74.42,15.62 0 bottom
U$100  [SPI0]  68.2,15.62 0 bottom
U$101  [10]  76.71,11.81 0 bottom
U$102  [00]  79.25,11.81 0 bottom
U$103  [GND-03]  66.29,30.73 270 bottom
U$104  [AS39350]  77.09,25.27 0 bottom
U$105  [LIGHTNING0]  78.23,23.11 0 bottom
U$106  [DETECTOR0]  77.72,20.83 0 bottom
U$107  [##0]  72.26,23.5 0 top
U$108  [##0]  75.95,18.41 0 bottom
U$109  [GND-03]  66.29,30.73 270 top
U$110  [CS#-<]-04]  68.83,11.68 270 top
U$111  [MOSI-(]-03]  73.91,12.45 270 top
U$112  [MISO-(]-03]  71.37,12.45 270 top
U$113  [SCK-(]-03]  76.45,11.81 270 top
U$114  [INT0]  78.99,11.68 270 top
U$115  [INT0]  76.45,30.61 270 top
U$116  [INT0]  78.99,11.68 270 bottom
U$117  [INT0]  76.45,30.61 270 bottom
U$118  [MOSI-(]-03]  73.91,12.45 270 bottom
U$119  [SCK-(]-03]  76.45,11.81 270 bottom
U$120  [#CS0]  68.83,11.68 270 bottom
U$121  SPARKX-LOGO2  [SPARKX-TINY]  107.06,27.05 0 top
U$122  [SPARKX-TINY]  88.14,28.57 0 bottom
U$123  [QWIIC_COPYRIGHT_SMALL]  87.76,14.1 0 top
U$124  [QWIIC_COPYRIGHT_SMALL]  87.76,24.38 0 bottom
U$125  [GND-03]  89.66,12.57 270 top
U$126  [GND-03]  89.66,12.57 270 bottom
U$127  [MISO-(]-03]  97.28,12.45 270 bottom
U$128  [3V3-03]  92.2,12.32 270 top
U$129  [3V3-03]  92.2,12.32 270 bottom
U$130  [3V3-03]  94.74,30.73 270 bottom
U$131  [3V3-03]  94.74,30.73 270 top
U$132  [SDA0]  97.28,30.61 270 top
U$133  [SDA0]  97.28,30.61 270 bottom
U$134  [SCL0]  99.82,30.61 270 bottom
U$135  [SCL0]  99.82,30.61 270 top
U$136  [OSHW-LOGO-S]  107.57,24.38 0 bottom
U$137  [PWR-()-03]  85.09,26.67 0 top
U$138  [ADR-()-04]  105.41,15.62 0 bottom
U$139  [I#C_PU0]  100.33,15.62 0 bottom
U$140  [SPI0]  94.11,15.62 0 bottom
U$141  [10]  102.62,11.81 0 bottom
U$142  [00]  105.16,11.81 0 bottom
U$143  [GND-03]  92.2,30.73 270 bottom
U$144  [AS39350]  103,25.27 0 bottom
U$145  [LIGHTNING0]  104.14,23.11 0 bottom
U$146  [DETECTOR0]  103.63,20.83 0 bottom
U$147  [##0]  98.17,23.5 0 top
U$148  [##0]  101.85,18.41 0 bottom
U$149  [GND-03]  92.2,30.73 270 top
U$150  [CS#-<]-04]  94.74,11.68 270 top
U$151  [MOSI-(]-03]  99.82,12.45 270 top
U$152  [MISO-(]-03]  97.28,12.45 270 top
U$153  [SCK-(]-03]  102.36,11.81 270 top
U$154  [INT0]  104.9,11.68 270 top
U$155  [INT0]  102.36,30.61 270 top
U$156  [INT0]  104.9,11.68 270 bottom
U$157  [INT0]  102.36,30.61 270 bottom
U$158  [MOSI-(]-03]  99.82,12.45 270 bottom
U$159  [SCK-(]-03]  102.36,11.81 270 bottom
U$160  [#CS0]  94.74,11.68 270 bottom
U$161  SPARKX-LOGO2  [SPARKX-TINY]  29.34,52.96 0 top
U$162  [SPARKX-TINY]  10.41,54.48 0 bottom
U$163  [QWIIC_COPYRIGHT_SMALL]  10.03,40 0 top
U$164  [QWIIC_COPYRIGHT_SMALL]  10.03,50.29 0 bottom
U$165  [GND-03]  11.94,38.48 270 top
U$166  [GND-03]  11.94,38.48 270 bottom
U$167  [MISO-(]-03]  19.56,38.35 270 bottom
U$168  [3V3-03]  14.48,38.23 270 top
U$169  [3V3-03]  14.48,38.23 270 bottom
U$170  [3V3-03]  17.02,56.64 270 bottom
U$171  [3V3-03]  17.02,56.64 270 top
U$172  [SDA0]  19.56,56.51 270 top
U$173  [SDA0]  19.56,56.51 270 bottom
U$174  [SCL0]  22.1,56.51 270 bottom
U$175  [SCL0]  22.1,56.51 270 top
U$176  [OSHW-LOGO-S]  29.84,50.29 0 bottom
U$177  [PWR-()-03]  7.37,52.58 0 top
U$178  [ADR-()-04]  27.69,41.53 0 bottom
U$179  [I#C_PU0]  22.61,41.53 0 bottom
U$180  [SPI0]  16.38,41.53 0 bottom
U$181  [10]  24.89,37.72 0 bottom
U$182  [00]  27.43,37.72 0 bottom
U$183  [GND-03]  14.48,56.64 270 bottom
U$184  [AS39350]  25.27,51.18 0 bottom
U$185  [LIGHTNING0]  26.42,49.02 0 bottom
U$186  [DETECTOR0]  25.91,46.74 0 bottom
U$187  [##0]  20.45,49.4 0 top
U$188  [##0]  24.13,44.32 0 bottom
U$189  [GND-03]  14.48,56.64 270 top
U$190  [CS#-<]-04]  17.02,37.59 270 top
U$191  [MOSI-(]-03]  22.1,38.35 270 top
U$192  [MISO-(]-03]  19.56,38.35 270 top
U$193  [SCK-(]-03]  24.64,37.72 270 top
U$194  [INT0]  27.18,37.59 270 top
U$195  [INT0]  24.64,56.51 270 top
U$196  [INT0]  27.18,37.59 270 bottom
U$197  [INT0]  24.64,56.51 270 bottom
U$198  [MOSI-(]-03]  22.1,38.35 270 bottom
U$199  [SCK-(]-03]  24.64,37.72 270 bottom
U$200  [#CS0]  17.02,37.59 270 bottom
U$201  SPARKX-LOGO2  [SPARKX-TINY]  55.24,52.96 0 top
U$202  [SPARKX-TINY]  36.32,54.48 0 bottom
U$203  [QWIIC_COPYRIGHT_SMALL]  35.94,40 0 top
U$204  [QWIIC_COPYRIGHT_SMALL]  35.94,50.29 0 bottom
U$205  [GND-03]  37.85,38.48 270 top
U$206  [GND-03]  37.85,38.48 270 bottom
U$207  [MISO-(]-03]  45.47,38.35 270 bottom
U$208  [3V3-03]  40.39,38.23 270 top
U$209  [3V3-03]  40.39,38.23 270 bottom
U$210  [3V3-03]  42.93,56.64 270 bottom
U$211  [3V3-03]  42.93,56.64 270 top
U$212  [SDA0]  45.47,56.51 270 top
U$213  [SDA0]  45.47,56.51 270 bottom
U$214  [SCL0]  48.01,56.51 270 bottom
U$215  [SCL0]  48.01,56.51 270 top
U$216  [OSHW-LOGO-S]  55.75,50.29 0 bottom
U$217  [PWR-()-03]  33.27,52.58 0 top
U$218  [ADR-()-04]  53.59,41.53 0 bottom
U$219  [I#C_PU0]  48.51,41.53 0 bottom
U$220  [SPI0]  42.29,41.53 0 bottom
U$221  [10]  50.8,37.72 0 bottom
U$222  [00]  53.34,37.72 0 bottom
U$223  [GND-03]  40.39,56.64 270 bottom
U$224  [AS39350]  51.18,51.18 0 bottom
U$225  [LIGHTNING0]  52.32,49.02 0 bottom
U$226  [DETECTOR0]  51.82,46.74 0 bottom
U$227  [##0]  46.35,49.4 0 top
U$228  [##0]  50.04,44.32 0 bottom
U$229  [GND-03]  40.39,56.64 270 top
U$230  [CS#-<]-04]  42.93,37.59 270 top
U$231  [MOSI-(]-03]  48.01,38.35 270 top
U$232  [MISO-(]-03]  45.47,38.35 270 top
U$233  [SCK-(]-03]  50.55,37.72 270 top
U$234  [INT0]  53.09,37.59 270 top
U$235  [INT0]  50.55,56.51 270 top
U$236  [INT0]  53.09,37.59 270 bottom
U$237  [INT0]  50.55,56.51 270 bottom
U$238  [MOSI-(]-03]  48.01,38.35 270 bottom
U$239  [SCK-(]-03]  50.55,37.72 270 bottom
U$240  [#CS0]  42.93,37.59 270 bottom
U$241  SPARKX-LOGO2  [SPARKX-TINY]  81.15,52.96 0 top
U$242  [SPARKX-TINY]  62.23,54.48 0 bottom
U$243  [QWIIC_COPYRIGHT_SMALL]  61.85,40 0 top
U$244  [QWIIC_COPYRIGHT_SMALL]  61.85,50.29 0 bottom
U$245  [GND-03]  63.75,38.48 270 top
U$246  [GND-03]  63.75,38.48 270 bottom
U$247  [MISO-(]-03]  71.37,38.35 270 bottom
U$248  [3V3-03]  66.29,38.23 270 top
U$249  [3V3-03]  66.29,38.23 270 bottom
U$250  [3V3-03]  68.83,56.64 270 bottom
U$251  [3V3-03]  68.83,56.64 270 top
U$252  [SDA0]  71.37,56.51 270 top
U$253  [SDA0]  71.37,56.51 270 bottom
U$254  [SCL0]  73.91,56.51 270 bottom
U$255  [SCL0]  73.91,56.51 270 top
U$256  [OSHW-LOGO-S]  81.66,50.29 0 bottom
U$257  [PWR-()-03]  59.18,52.58 0 top
U$258  [ADR-()-04]  79.5,41.53 0 bottom
U$259  [I#C_PU0]  74.42,41.53 0 bottom
U$260  [SPI0]  68.2,41.53 0 bottom
U$261  [10]  76.71,37.72 0 bottom
U$262  [00]  79.25,37.72 0 bottom
U$263  [GND-03]  66.29,56.64 270 bottom
U$264  [AS39350]  77.09,51.18 0 bottom
U$265  [LIGHTNING0]  78.23,49.02 0 bottom
U$266  [DETECTOR0]  77.72,46.74 0 bottom
U$267  [##0]  72.26,49.4 0 top
U$268  [##0]  75.95,44.32 0 bottom
U$269  [GND-03]  66.29,56.64 270 top
U$270  [CS#-<]-04]  68.83,37.59 270 top
U$271  [MOSI-(]-03]  73.91,38.35 270 top
U$272  [MISO-(]-03]  71.37,38.35 270 top
U$273  [SCK-(]-03]  76.45,37.72 270 top
U$274  [INT0]  78.99,37.59 270 top
U$275  [INT0]  76.45,56.51 270 top
U$276  [INT0]  78.99,37.59 270 bottom
U$277  [INT0]  76.45,56.51 270 bottom
U$278  [MOSI-(]-03]  73.91,38.35 270 bottom
U$279  [SCK-(]-03]  76.45,37.72 270 bottom
U$280  [#CS0]  68.83,37.59 270 bottom
U$281  SPARKX-LOGO2  [SPARKX-TINY]  107.06,52.96 0 top
U$282  [SPARKX-TINY]  88.14,54.48 0 bottom
U$283  [QWIIC_COPYRIGHT_SMALL]  87.76,40 0 top
U$284  [QWIIC_COPYRIGHT_SMALL]  87.76,50.29 0 bottom
U$285  [GND-03]  89.66,38.48 270 top
U$286  [GND-03]  89.66,38.48 270 bottom
U$287  [MISO-(]-03]  97.28,38.35 270 bottom
U$288  [3V3-03]  92.2,38.23 270 top
U$289  [3V3-03]  92.2,38.23 270 bottom
U$290  [3V3-03]  94.74,56.64 270 bottom
U$291  [3V3-03]  94.74,56.64 270 top
U$292  [SDA0]  97.28,56.51 270 top
U$293  [SDA0]  97.28,56.51 270 bottom
U$294  [SCL0]  99.82,56.51 270 bottom
U$295  [SCL0]  99.82,56.51 270 top
U$296  [OSHW-LOGO-S]  107.57,50.29 0 bottom
U$297  [PWR-()-03]  85.09,52.58 0 top
U$298  [ADR-()-04]  105.41,41.53 0 bottom
U$299  [I#C_PU0]  100.33,41.53 0 bottom
U$300  [SPI0]  94.11,41.53 0 bottom
U$301  [10]  102.62,37.72 0 bottom
U$302  [00]  105.16,37.72 0 bottom
U$303  [GND-03]  92.2,56.64 270 bottom
U$304  [AS39350]  103,51.18 0 bottom
U$305  [LIGHTNING0]  104.14,49.02 0 bottom
U$306  [DETECTOR0]  103.63,46.74 0 bottom
U$307  [##0]  98.17,49.4 0 top
U$308  [##0]  101.85,44.32 0 bottom
U$309  [GND-03]  92.2,56.64 270 top
U$310  [CS#-<]-04]  94.74,37.59 270 top
U$311  [MOSI-(]-03]  99.82,38.35 270 top
U$312  [MISO-(]-03]  97.28,38.35 270 top
U$313  [SCK-(]-03]  102.36,37.72 270 top
U$314  [INT0]  104.9,37.59 270 top
U$315  [INT0]  102.36,56.51 270 top
U$316  [INT0]  104.9,37.59 270 bottom
U$317  [INT0]  102.36,56.51 270 bottom
U$318  [MOSI-(]-03]  99.82,38.35 270 bottom
U$319  [SCK-(]-03]  102.36,37.72 270 bottom
U$320  [#CS0]  94.74,37.59 270 bottom
U$321  SPARKX-LOGO2  [SPARKX-TINY]  29.34,78.87 0 top
U$322  [SPARKX-TINY]  10.41,80.39 0 bottom
U$323  [QWIIC_COPYRIGHT_SMALL]  10.03,65.91 0 top
U$324  [QWIIC_COPYRIGHT_SMALL]  10.03,76.2 0 bottom
U$325  [GND-03]  11.94,64.39 270 top
U$326  [GND-03]  11.94,64.39 270 bottom
U$327  [MISO-(]-03]  19.56,64.26 270 bottom
U$328  [3V3-03]  14.48,64.14 270 top
U$329  [3V3-03]  14.48,64.14 270 bottom
U$330  [3V3-03]  17.02,82.55 270 bottom
U$331  [3V3-03]  17.02,82.55 270 top
U$332  [SDA0]  19.56,82.42 270 top
U$333  [SDA0]  19.56,82.42 270 bottom
U$334  [SCL0]  22.1,82.42 270 bottom
U$335  [SCL0]  22.1,82.42 270 top
U$336  [OSHW-LOGO-S]  29.84,76.2 0 bottom
U$337  [PWR-()-03]  7.37,78.49 0 top
U$338  [ADR-()-04]  27.69,67.44 0 bottom
U$339  [I#C_PU0]  22.61,67.44 0 bottom
U$340  [SPI0]  16.38,67.44 0 bottom
U$341  [10]  24.89,63.63 0 bottom
U$342  [00]  27.43,63.63 0 bottom
U$343  [GND-03]  14.48,82.55 270 bottom
U$344  [AS39350]  25.27,77.09 0 bottom
U$345  [LIGHTNING0]  26.42,74.93 0 bottom
U$346  [DETECTOR0]  25.91,72.64 0 bottom
U$347  [##0]  20.45,75.31 0 top
U$348  [##0]  24.13,70.23 0 bottom
U$349  [GND-03]  14.48,82.55 270 top
U$350  [CS#-<]-04]  17.02,63.5 270 top
U$351  [MOSI-(]-03]  22.1,64.26 270 top
U$352  [MISO-(]-03]  19.56,64.26 270 top
U$353  [SCK-(]-03]  24.64,63.63 270 top
U$354  [INT0]  27.18,63.5 270 top
U$355  [INT0]  24.64,82.42 270 top
U$356  [INT0]  27.18,63.5 270 bottom
U$357  [INT0]  24.64,82.42 270 bottom
U$358  [MOSI-(]-03]  22.1,64.26 270 bottom
U$359  [SCK-(]-03]  24.64,63.63 270 bottom
U$360  [#CS0]  17.02,63.5 270 bottom
U$361  SPARKX-LOGO2  [SPARKX-TINY]  55.24,78.87 0 top
U$362  [SPARKX-TINY]  36.32,80.39 0 bottom
U$363  [QWIIC_COPYRIGHT_SMALL]  35.94,65.91 0 top
U$364  [QWIIC_COPYRIGHT_SMALL]  35.94,76.2 0 bottom
U$365  [GND-03]  37.85,64.39 270 top
U$366  [GND-03]  37.85,64.39 270 bottom
U$367  [MISO-(]-03]  45.47,64.26 270 bottom
U$368  [3V3-03]  40.39,64.14 270 top
U$369  [3V3-03]  40.39,64.14 270 bottom
U$370  [3V3-03]  42.93,82.55 270 bottom
U$371  [3V3-03]  42.93,82.55 270 top
U$372  [SDA0]  45.47,82.42 270 top
U$373  [SDA0]  45.47,82.42 270 bottom
U$374  [SCL0]  48.01,82.42 270 bottom
U$375  [SCL0]  48.01,82.42 270 top
U$376  [OSHW-LOGO-S]  55.75,76.2 0 bottom
U$377  [PWR-()-03]  33.27,78.49 0 top
U$378  [ADR-()-04]  53.59,67.44 0 bottom
U$379  [I#C_PU0]  48.51,67.44 0 bottom
U$380  [SPI0]  42.29,67.44 0 bottom
U$381  [10]  50.8,63.63 0 bottom
U$382  [00]  53.34,63.63 0 bottom
U$383  [GND-03]  40.39,82.55 270 bottom
U$384  [AS39350]  51.18,77.09 0 bottom
U$385  [LIGHTNING0]  52.32,74.93 0 bottom
U$386  [DETECTOR0]  51.82,72.64 0 bottom
U$387  [##0]  46.35,75.31 0 top
U$388  [##0]  50.04,70.23 0 bottom
U$389  [GND-03]  40.39,82.55 270 top
U$390  [CS#-<]-04]  42.93,63.5 270 top
U$391  [MOSI-(]-03]  48.01,64.26 270 top
U$392  [MISO-(]-03]  45.47,64.26 270 top
U$393  [SCK-(]-03]  50.55,63.63 270 top
U$394  [INT0]  53.09,63.5 270 top
U$395  [INT0]  50.55,82.42 270 top
U$396  [INT0]  53.09,63.5 270 bottom
U$397  [INT0]  50.55,82.42 270 bottom
U$398  [MOSI-(]-03]  48.01,64.26 270 bottom
U$399  [SCK-(]-03]  50.55,63.63 270 bottom
U$400  [#CS0]  42.93,63.5 270 bottom
U$401  SPARKX-LOGO2  [SPARKX-TINY]  81.15,78.87 0 top
U$402  [SPARKX-TINY]  62.23,80.39 0 bottom
U$403  [QWIIC_COPYRIGHT_SMALL]  61.85,65.91 0 top
U$404  [QWIIC_COPYRIGHT_SMALL]  61.85,76.2 0 bottom
U$405  [GND-03]  63.75,64.39 270 top
U$406  [GND-03]  63.75,64.39 270 bottom
U$407  [MISO-(]-03]  71.37,64.26 270 bottom
U$408  [3V3-03]  66.29,64.14 270 top
U$409  [3V3-03]  66.29,64.14 270 bottom
U$410  [3V3-03]  68.83,82.55 270 bottom
U$411  [3V3-03]  68.83,82.55 270 top
U$412  [SDA0]  71.37,82.42 270 top
U$413  [SDA0]  71.37,82.42 270 bottom
U$414  [SCL0]  73.91,82.42 270 bottom
U$415  [SCL0]  73.91,82.42 270 top
U$416  [OSHW-LOGO-S]  81.66,76.2 0 bottom
U$417  [PWR-()-03]  59.18,78.49 0 top
U$418  [ADR-()-04]  79.5,67.44 0 bottom
U$419  [I#C_PU0]  74.42,67.44 0 bottom
U$420  [SPI0]  68.2,67.44 0 bottom
U$421  [10]  76.71,63.63 0 bottom
U$422  [00]  79.25,63.63 0 bottom
U$423  [GND-03]  66.29,82.55 270 bottom
U$424  [AS39350]  77.09,77.09 0 bottom
U$425  [LIGHTNING0]  78.23,74.93 0 bottom
U$426  [DETECTOR0]  77.72,72.64 0 bottom
U$427  [##0]  72.26,75.31 0 top
U$428  [##0]  75.95,70.23 0 bottom
U$429  [GND-03]  66.29,82.55 270 top
U$430  [CS#-<]-04]  68.83,63.5 270 top
U$431  [MOSI-(]-03]  73.91,64.26 270 top
U$432  [MISO-(]-03]  71.37,64.26 270 top
U$433  [SCK-(]-03]  76.45,63.63 270 top
U$434  [INT0]  78.99,63.5 270 top
U$435  [INT0]  76.45,82.42 270 top
U$436  [INT0]  78.99,63.5 270 bottom
U$437  [INT0]  76.45,82.42 270 bottom
U$438  [MOSI-(]-03]  73.91,64.26 270 bottom
U$439  [SCK-(]-03]  76.45,63.63 270 bottom
U$440  [#CS0]  68.83,63.5 270 bottom
U$441  SPARKX-LOGO2  [SPARKX-TINY]  107.06,78.87 0 top
U$442  [SPARKX-TINY]  88.14,80.39 0 bottom
U$443  [QWIIC_COPYRIGHT_SMALL]  87.76,65.91 0 top
U$444  [QWIIC_COPYRIGHT_SMALL]  87.76,76.2 0 bottom
U$445  [GND-03]  89.66,64.39 270 top
U$446  [GND-03]  89.66,64.39 270 bottom
U$447  [MISO-(]-03]  97.28,64.26 270 bottom
U$448  [3V3-03]  92.2,64.14 270 top
U$449  [3V3-03]  92.2,64.14 270 bottom
U$450  [3V3-03]  94.74,82.55 270 bottom
U$451  [3V3-03]  94.74,82.55 270 top
U$452  [SDA0]  97.28,82.42 270 top
U$453  [SDA0]  97.28,82.42 270 bottom
U$454  [SCL0]  99.82,82.42 270 bottom
U$455  [SCL0]  99.82,82.42 270 top
U$456  [OSHW-LOGO-S]  107.57,76.2 0 bottom
U$457  [PWR-()-03]  85.09,78.49 0 top
U$458  [ADR-()-04]  105.41,67.44 0 bottom
U$459  [I#C_PU0]  100.33,67.44 0 bottom
U$460  [SPI0]  94.11,67.44 0 bottom
U$461  [10]  102.62,63.63 0 bottom
U$462  [00]  105.16,63.63 0 bottom
U$463  [GND-03]  92.2,82.55 270 bottom
U$464  [AS39350]  103,77.09 0 bottom
U$465  [LIGHTNING0]  104.14,74.93 0 bottom
U$466  [DETECTOR0]  103.63,72.64 0 bottom
U$467  [##0]  98.17,75.31 0 top
U$468  [##0]  101.85,70.23 0 bottom
U$469  [GND-03]  92.2,82.55 270 top
U$470  [CS#-<]-04]  94.74,63.5 270 top
U$471  [MOSI-(]-03]  99.82,64.26 270 top
U$472  [MISO-(]-03]  97.28,64.26 270 top
U$473  [SCK-(]-03]  102.36,63.63 270 top
U$474  [INT0]  104.9,63.5 270 top
U$475  [INT0]  102.36,82.42 270 top
U$476  [INT0]  104.9,63.5 270 bottom
U$477  [INT0]  102.36,82.42 270 bottom
U$478  [MOSI-(]-03]  99.82,64.26 270 bottom
U$479  [SCK-(]-03]  102.36,63.63 270 bottom
U$480  [#CS0]  94.74,63.5 270 bottom
U$481  SPARKX-LOGO2  [SPARKX-TINY]  29.34,104.78 0 top
U$482  [SPARKX-TINY]  10.41,106.3 0 bottom
U$483  [QWIIC_COPYRIGHT_SMALL]  10.03,91.82 0 top
U$484  [QWIIC_COPYRIGHT_SMALL]  10.03,102.11 0 bottom
U$485  [GND-03]  11.94,90.3 270 top
U$486  [GND-03]  11.94,90.3 270 bottom
U$487  [MISO-(]-03]  19.56,90.17 270 bottom
U$488  [3V3-03]  14.48,90.04 270 top
U$489  [3V3-03]  14.48,90.04 270 bottom
U$490  [3V3-03]  17.02,108.46 270 bottom
U$491  [3V3-03]  17.02,108.46 270 top
U$492  [SDA0]  19.56,108.33 270 top
U$493  [SDA0]  19.56,108.33 270 bottom
U$494  [SCL0]  22.1,108.33 270 bottom
U$495  [SCL0]  22.1,108.33 270 top
U$496  [OSHW-LOGO-S]  29.84,102.11 0 bottom
U$497  [PWR-()-03]  7.37,104.39 0 top
U$498  [ADR-()-04]  27.69,93.34 0 bottom
U$499  [I#C_PU0]  22.61,93.34 0 bottom
U$500  [SPI0]  16.38,93.34 0 bottom
U$501  [10]  24.89,89.54 0 bottom
U$502  [00]  27.43,89.54 0 bottom
U$503  [GND-03]  14.48,108.46 270 bottom
U$504  [AS39350]  25.27,103 0 bottom
U$505  [LIGHTNING0]  26.42,100.84 0 bottom
U$506  [DETECTOR0]  25.91,98.55 0 bottom
U$507  [##0]  20.45,101.22 0 top
U$508  [##0]  24.13,96.14 0 bottom
U$509  [GND-03]  14.48,108.46 270 top
U$510  [CS#-<]-04]  17.02,89.41 270 top
U$511  [MOSI-(]-03]  22.1,90.17 270 top
U$512  [MISO-(]-03]  19.56,90.17 270 top
U$513  [SCK-(]-03]  24.64,89.54 270 top
U$514  [INT0]  27.18,89.41 270 top
U$515  [INT0]  24.64,108.33 270 top
U$516  [INT0]  27.18,89.41 270 bottom
U$517  [INT0]  24.64,108.33 270 bottom
U$518  [MOSI-(]-03]  22.1,90.17 270 bottom
U$519  [SCK-(]-03]  24.64,89.54 270 bottom
U$520  [#CS0]  17.02,89.41 270 bottom
U$521  SPARKX-LOGO2  [SPARKX-TINY]  55.24,104.78 0 top
U$522  [SPARKX-TINY]  36.32,106.3 0 bottom
U$523  [QWIIC_COPYRIGHT_SMALL]  35.94,91.82 0 top
U$524  [QWIIC_COPYRIGHT_SMALL]  35.94,102.11 0 bottom
U$525  [GND-03]  37.85,90.3 270 top
U$526  [GND-03]  37.85,90.3 270 bottom
U$527  [MISO-(]-03]  45.47,90.17 270 bottom
U$528  [3V3-03]  40.39,90.04 270 top
U$529  [3V3-03]  40.39,90.04 270 bottom
U$530  [3V3-03]  42.93,108.46 270 bottom
U$531  [3V3-03]  42.93,108.46 270 top
U$532  [SDA0]  45.47,108.33 270 top
U$533  [SDA0]  45.47,108.33 270 bottom
U$534  [SCL0]  48.01,108.33 270 bottom
U$535  [SCL0]  48.01,108.33 270 top
U$536  [OSHW-LOGO-S]  55.75,102.11 0 bottom
U$537  [PWR-()-03]  33.27,104.39 0 top
U$538  [ADR-()-04]  53.59,93.34 0 bottom
U$539  [I#C_PU0]  48.51,93.34 0 bottom
U$540  [SPI0]  42.29,93.34 0 bottom
U$541  [10]  50.8,89.54 0 bottom
U$542  [00]  53.34,89.54 0 bottom
U$543  [GND-03]  40.39,108.46 270 bottom
U$544  [AS39350]  51.18,103 0 bottom
U$545  [LIGHTNING0]  52.32,100.84 0 bottom
U$546  [DETECTOR0]  51.82,98.55 0 bottom
U$547  [##0]  46.35,101.22 0 top
U$548  [##0]  50.04,96.14 0 bottom
U$549  [GND-03]  40.39,108.46 270 top
U$550  [CS#-<]-04]  42.93,89.41 270 top
U$551  [MOSI-(]-03]  48.01,90.17 270 top
U$552  [MISO-(]-03]  45.47,90.17 270 top
U$553  [SCK-(]-03]  50.55,89.54 270 top
U$554  [INT0]  53.09,89.41 270 top
U$555  [INT0]  50.55,108.33 270 top
U$556  [INT0]  53.09,89.41 270 bottom
U$557  [INT0]  50.55,108.33 270 bottom
U$558  [MOSI-(]-03]  48.01,90.17 270 bottom
U$559  [SCK-(]-03]  50.55,89.54 270 bottom
U$560  [#CS0]  42.93,89.41 270 bottom
U$561  SPARKX-LOGO2  [SPARKX-TINY]  81.15,104.78 0 top
U$562  [SPARKX-TINY]  62.23,106.3 0 bottom
U$563  [QWIIC_COPYRIGHT_SMALL]  61.85,91.82 0 top
U$564  [QWIIC_COPYRIGHT_SMALL]  61.85,102.11 0 bottom
U$565  [GND-03]  63.75,90.3 270 top
U$566  [GND-03]  63.75,90.3 270 bottom
U$567  [MISO-(]-03]  71.37,90.17 270 bottom
U$568  [3V3-03]  66.29,90.04 270 top
U$569  [3V3-03]  66.29,90.04 270 bottom
U$570  [3V3-03]  68.83,108.46 270 bottom
U$571  [3V3-03]  68.83,108.46 270 top
U$572  [SDA0]  71.37,108.33 270 top
U$573  [SDA0]  71.37,108.33 270 bottom
U$574  [SCL0]  73.91,108.33 270 bottom
U$575  [SCL0]  73.91,108.33 270 top
U$576  [OSHW-LOGO-S]  81.66,102.11 0 bottom
U$577  [PWR-()-03]  59.18,104.39 0 top
U$578  [ADR-()-04]  79.5,93.34 0 bottom
U$579  [I#C_PU0]  74.42,93.34 0 bottom
U$580  [SPI0]  68.2,93.34 0 bottom
U$581  [10]  76.71,89.54 0 bottom
U$582  [00]  79.25,89.54 0 bottom
U$583  [GND-03]  66.29,108.46 270 bottom
U$584  [AS39350]  77.09,103 0 bottom
U$585  [LIGHTNING0]  78.23,100.84 0 bottom
U$586  [DETECTOR0]  77.72,98.55 0 bottom
U$587  [##0]  72.26,101.22 0 top
U$588  [##0]  75.95,96.14 0 bottom
U$589  [GND-03]  66.29,108.46 270 top
U$590  [CS#-<]-04]  68.83,89.41 270 top
U$591  [MOSI-(]-03]  73.91,90.17 270 top
U$592  [MISO-(]-03]  71.37,90.17 270 top
U$593  [SCK-(]-03]  76.45,89.54 270 top
U$594  [INT0]  78.99,89.41 270 top
U$595  [INT0]  76.45,108.33 270 top
U$596  [INT0]  78.99,89.41 270 bottom
U$597  [INT0]  76.45,108.33 270 bottom
U$598  [MOSI-(]-03]  73.91,90.17 270 bottom
U$599  [SCK-(]-03]  76.45,89.54 270 bottom
U$600  [#CS0]  68.83,89.41 270 bottom
U$601  SPARKX-LOGO2  [SPARKX-TINY]  107.06,104.78 0 top
U$602  [SPARKX-TINY]  88.14,106.3 0 bottom
U$603  [QWIIC_COPYRIGHT_SMALL]  87.76,91.82 0 top
U$604  [QWIIC_COPYRIGHT_SMALL]  87.76,102.11 0 bottom
U$605  [GND-03]  89.66,90.3 270 top
U$606  [GND-03]  89.66,90.3 270 bottom
U$607  [MISO-(]-03]  97.28,90.17 270 bottom
U$608  [3V3-03]  92.2,90.04 270 top
U$609  [3V3-03]  92.2,90.04 270 bottom
U$610  [3V3-03]  94.74,108.46 270 bottom
U$611  [3V3-03]  94.74,108.46 270 top
U$612  [SDA0]  97.28,108.33 270 top
U$613  [SDA0]  97.28,108.33 270 bottom
U$614  [SCL0]  99.82,108.33 270 bottom
U$615  [SCL0]  99.82,108.33 270 top
U$616  [OSHW-LOGO-S]  107.57,102.11 0 bottom
U$617  [PWR-()-03]  85.09,104.39 0 top
U$618  [ADR-()-04]  105.41,93.34 0 bottom
U$619  [I#C_PU0]  100.33,93.34 0 bottom
U$620  [SPI0]  94.11,93.34 0 bottom
U$621  [10]  102.62,89.54 0 bottom
U$622  [00]  105.16,89.54 0 bottom
U$623  [GND-03]  92.2,108.46 270 bottom
U$624  [AS39350]  103,103 0 bottom
U$625  [LIGHTNING0]  104.14,100.84 0 bottom
U$626  [DETECTOR0]  103.63,98.55 0 bottom
U$627  [##0]  98.17,101.22 0 top
U$628  [##0]  101.85,96.14 0 bottom
U$629  [GND-03]  92.2,108.46 270 top
U$630  [CS#-<]-04]  94.74,89.41 270 top
U$631  [MOSI-(]-03]  99.82,90.17 270 top
U$632  [MISO-(]-03]  97.28,90.17 270 top
U$633  [SCK-(]-03]  102.36,89.54 270 top
U$634  [INT0]  104.9,89.41 270 top
U$635  [INT0]  102.36,108.33 270 top
U$636  [INT0]  104.9,89.41 270 bottom
U$637  [INT0]  102.36,108.33 270 bottom
U$638  [MOSI-(]-03]  99.82,90.17 270 bottom
U$639  [SCK-(]-03]  102.36,89.54 270 bottom
U$640  [#CS0]  94.74,89.41 270 bottom